# Altium PCB PCB.PcbDoc
Units mm, origin at the board's own origin, x right, y up, seen from the top; angles counter-clockwise.
Board outline 12.45 x 8.38 mm, 2 copper layers (Top Layer, Bottom Layer); 6 components, 4 nets, 14 pads, 0 vias.
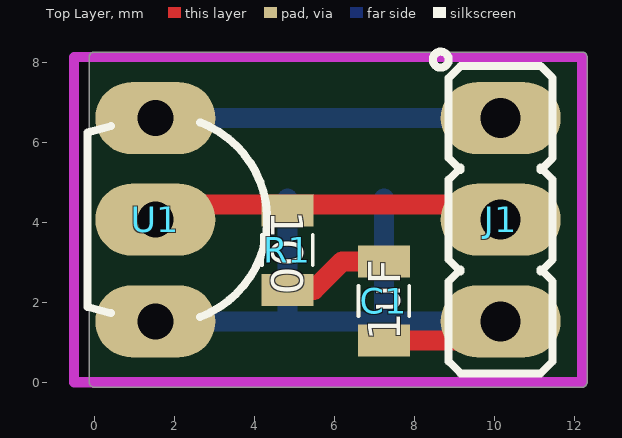
[diagram p0: Top Layer view]
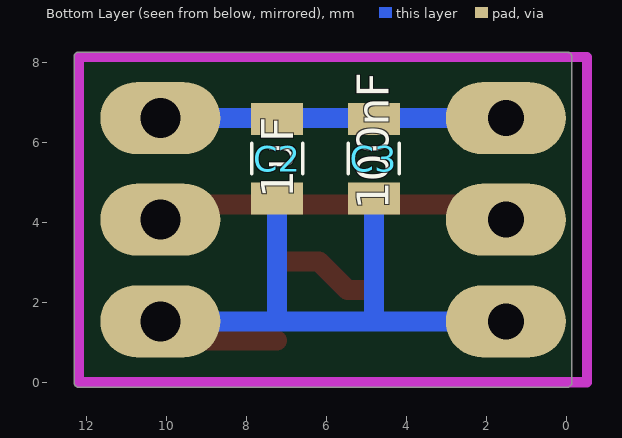
[diagram p1: Bottom Layer view, seen from below]

## Layer stack, top to bottom
Top Solder: solder mask 0.0102, Solder Resist, Dk 3.5
Top Layer: signal copper 0.0356
Dielectric 1: dielectric 0.32, FR-4, Dk 4.8
Bottom Layer: signal copper 0.0356
Bottom Solder: solder mask 0.0102, Solder Resist, Dk 3.5

## Board outline
0,-0.127 cw(c0,0) -0.127,0 -0.127,8.128 cw(c0,8.128) 0,8.255 12.192,8.255 cw(c12.192,8.128) 12.319,8.128 12.319,0 cw(c12.192,0) 12.192,-0.127

## Design rules (kind name [scope] priority, off if disabled: settings)
Clearance [All] p1: gap=0.3
PolygonConnect [All] p1: connectstyle=Relief reliefconductorwidth=0.254 reliefentries=4 polygonreliefangle="90 Angle" airgapwidth=0.254
RoomDefinition Main [InComponentClass('Main')] p1: confinementstyle=ConfineIn formatcopy=TRUE lockcomponents=FALSE outline -24.638,-36.83 26.162,-36.83 26.162,-11.43 -24.638,-11.43
RoutingVias [All] p1: holewidth=0.3 width=0.6 viastyle="Through Hole" minholewidth=0.3 minwidth=0.6 maxholewidth=0.3 maxwidth=0.6
SolderMaskExpansion [All] p1: expansion=0.102
Width [All] p1: maxlimit=0.5 minlimit=0.3 preferedwidth=0.3
30 further rules are at their usual default settings.

## Components (designator, comment, footprint, x,y, rotation, side; value= is the part's Value field where it differs from the comment)
C1 "1uF" 0805 7.239,2.032 r90 top
C2 "1uF" 0805 7.239,5.588 r90 bottom
C3 "100nF" 0805 4.826,5.588 r90 bottom
J1 "2PIN" HEADER_THD_STAND_MALE_1X3 10.16,4.064 r270 top
R1 "100" 0805 4.826,3.302 r270 top (schematic designator R9)
U1 "LM35" TO92_3Pin_Form6 1.524,4.064 r270 top

## Footprints (in the part's own frame and the unit in brackets; to place one, negate y for a bottom-side part, rotate by r counter-clockwise, add the part's x,y. Pads: shape width x height; smd on the part's side, far side on the other; paste and mask are expansions set on the pad)
0805 [mm] "Chip Resistor, Body 2.0x1.3mm, IPC Medium Density"
  rect 0.8x1.3 smd: 1(-0.991,0) 2(0.991,0)
  silkscreen extent -0.38,-0.64 0.38,0.64, body extent -1.07,-0.7 1.07,0.7, height 0.65
HEADER_THD_STAND_MALE_1X3 [mm] "Connector; Header; 3 Position"
  oval 1.8x3 hole 1 mask+0.1: 1(-2.54,0) 2(0,0) 3(2.54,0)
  silkscreen extent -4.2,-1.7 3.84,1.3, body extent -3.78,-1.27 3.84,1.27, height 8.54
TO92_3Pin_Form6 [mm] "TO-92, TO-226, SOT54A"
  oval 1.8x3 hole 0.9: 1(-2.54,0) 2(0,0) 3(2.54,0)
  silkscreen extent -2.43,-1.7 2.43,2.8, body extent -2.79,-11.52 2.79,1.48, height 3.11

## Part data
C1 C2 C3: library part Cap, "Capacitor"
J1: library part Connector1x3_Male, "Connector, Header, 2Pin"
R1: library part Res1, "Resistor"
U1: library part Sensor_LM35, "Temperature Sensors"

## Nets (pads, with @x,y where several pads share a name; then routed paths per layer and width w, separated by ;. In a path a pad name is that pad's centre, name@x,y a point inside that pad or via, vN(x,y) a via of type N, cw(c..) or ccw(c..) an arc to the next point about the centre after c; other vN are vias at no path point)
GND: C1.1 C2.1 C3.1 J1.3 U1.3 | length 17.4
  Top Layer w0.5: C1.1 9.677,1.041 J1.3
  Bottom Layer w0.5: U1.3@1.905,1.524 4.826,1.524 ; C3.1 4.826,1.524 ; 7.239,1.651 C2.1 ; J1.3 4.826,1.524
NetC1_2: C1.2 R1.2 | length 2.7
  Top Layer w0.5: R1.2 5.486,2.311 6.198,3.023 C1.2
OUT: J1.2 R1.1 U1.2 | length 8.3
  Top Layer w0.5: U1.2@1.905,4.445 J1.2@10.16,4.445
VDD: C2.2 C3.2 J1.1 U1.1 | length 8.3
  Bottom Layer w0.5: U1.1@1.905,6.604 J1.1

## Keep-outs
Keep-Out Layer:
  lines w0.254: -0.508,0 12.192,0 12.192,8.128 -0.508,8.128 -0.508,0

## Silkscreen, mask and mechanical layers (free items; w line width, h text height)
Mechanical 15:
  rectangle: 3.556,13.208 5.08,14.732
  rectangle: 14.478,13.208 16.002,14.732
  rectangle: 5.842,9.652 7.366,11.176
  rectangle: 9.652,9.652 11.176,11.176
  rectangle: 9.652,7.112 11.176,8.636
  rectangle: 5.842,7.112 7.366,8.636
  rectangle: 5.842,4.572 7.366,6.096
  rectangle: 9.652,4.572 11.176,6.096
  rectangle: 30.226,11.938 31.75,13.462
  rectangle: 25.654,9.398 27.178,10.922
  rectangle: 27.94,8.636 29.464,10.16
  rectangle: 30.226,6.604 31.75,8.128
  rectangle: 23.114,8.382 24.638,9.906
  rectangle: 20.066,11.176 21.59,12.7
  rectangle: 28.194,4.572 29.718,6.096
  rectangle: 23.114,4.826 24.638,6.35
  rectangle: 30.226,1.27 31.75,2.794
  rectangle: 25.654,3.81 27.178,5.334
  rectangle: 13.208,0.762 14.732,2.286
  rectangle: 13.462,-1.778 14.986,-0.254
  rectangle: 17.272,-1.778 18.796,-0.254
  rectangle: 17.272,0.508 18.796,2.032